# Altium PCB Receiver.PcbDoc
Units mil, origin at the board's own origin, x right, y up, seen from the top; angles counter-clockwise.
Board outline 6000 x 4000 mil, 2 copper layers (Top Layer, Bottom Layer); 42 components, 41 nets, 238 pads, 0 vias.
Unrouted connection lines stored in the file: 111.
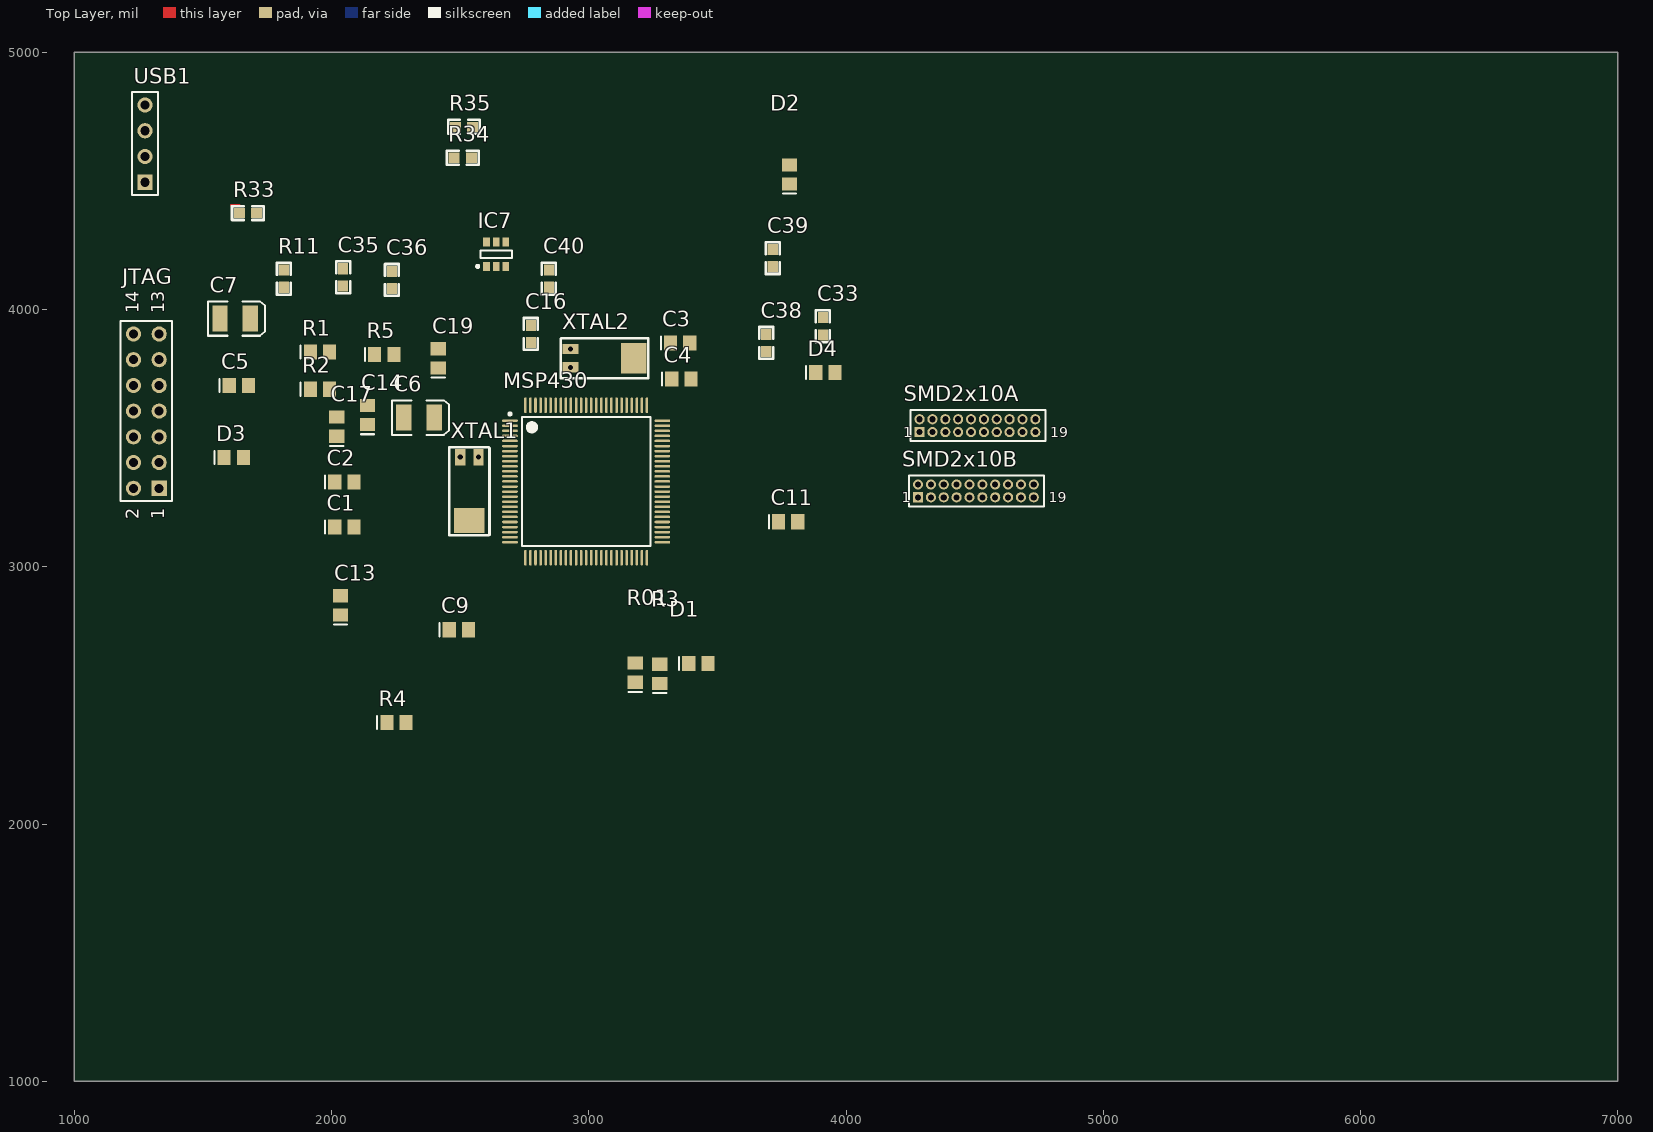
[diagram p0: Top Layer view]
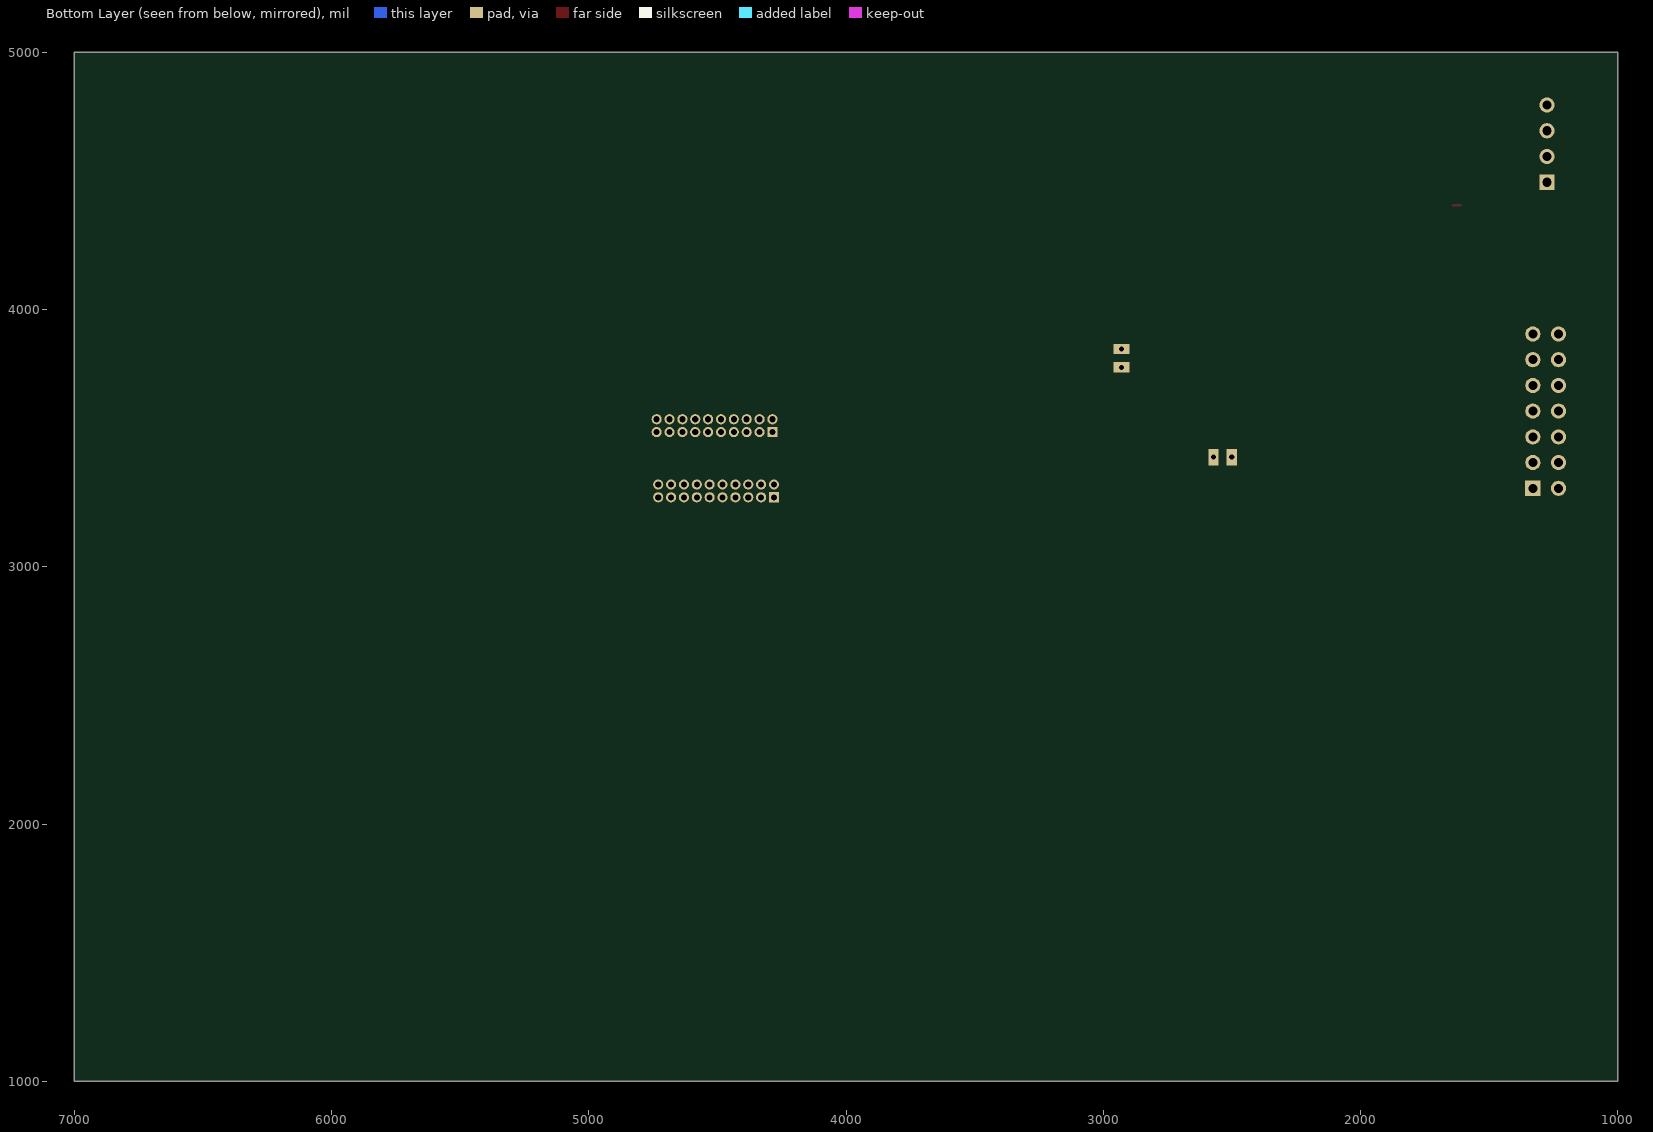
[diagram p1: Bottom Layer view, seen from below]

## Layer stack, top to bottom
Top Layer: signal copper 1.4
Dielectric: dielectric 12.6, FR-4, Dk 4.8
Bottom Layer: signal copper 1.4

## Board outline
1000,1000 7000,1000 7000,5000 1000,5000

## Design rules (kind name [scope] priority, off if disabled: settings)
Clearance [All] p1: gap=5
PolygonConnect [All] p1: connectstyle=Relief reliefconductorwidth=10 reliefentries=4 polygonreliefangle="90 Angle"
RoomDefinition Receiver [InComponentClass('Receiver')] p1: confinementstyle=ConfineIn formatcopy=TRUE lockcomponents=FALSE outline 990,990 7005,990 7005,5005 990,5005
RoutingVias [All] p1: holewidth=28 width=50 viastyle="Through Hole" minholewidth=28 minwidth=50 maxholewidth=28 maxwidth=50
SMDNeckDown [All] p1: percent=50.000
SilkscreenOverComponentPads [All] p1: minsilkscreentomaskgap=10
SolderMaskExpansion [All] p1: expansion=4
Width [All] p1: maxlimit=10 minlimit=10 preferedwidth=10
27 further rules are at their usual default settings.

## Components (designator, comment, footprint, x,y, rotation, side; value= is the part's Value field where it differs from the comment)
C1 "12pF" CC2012-0805 2050,3155 r0 top
C2 "12pF" CC2012-0805 2050,3330 r0 top
C3 "47pF" CC2012-0805 3355,3870 r0 top
C4 "47pF" CC2012-0805 3360,3730 r0 top
C5 "100nF" CC2012-0805 1640,3705 r0 top
C6 "10uF" 3.5x2.8x1.9 2340,3580 r0 top
C7 "10uF" 3.5x2.8x1.9 1625,3965 r0 top
C9 "470nF" CC2012-0805 2495,2755 r0 top
C11 "100nF" CC2012-0805 3775,3175 r0 top
C13 "100nF" CC2012-0805 2035,2850 r90 top
C14 "100nF" CC2012-0805 2140,3590 r90 top
C16 "4.7nF" 0603 2775,3905 r90 top
C17 "100nF" CC2012-0805 2020,3545 r90 top
C19 "100nF" CC2012-0805 2415,3810 r90 top
C33 "220n" 0603 3910,3935 r90 top
C35 "10p" 0603 2045,4125 r90 top
C36 "10p" 0603 2235,4115 r90 top
C38 "220n" 0603 3690,3870 r90 top
C39 "4u7" 0603 3715,4200 r90 top
C40 "0.1u" 0603 2845,4120 r90 top
D1 "LED2" CC2012-0805 3426.06,2623.53 r0 top
D2 "LL103A" CC2012-0805 3780,4525 r90 top
D3 "LL103A" CC2012-0805 1620,3425 r0 top
D4 "LL103A" CC2012-0805 3920,3755 r0 top
IC7 "USBLC6-2SC6" SOT23-6_L 2640,4215 r90 top
JTAG "Header 7X2" HDR2X7 1330,3305 r90 top
MSP430 "MSP430F6638" PZ100_L 2989.84,3331.56 r0 top
R01 "Res2" CC2012-0805 3181.06,2588.53 r90 top
R1 "0" CC2012-0805 1955,3835 r0 top
R2 "0" CC2012-0805 1955,3690 r0 top
R3 "330" CC2012-0805 3276.06,2583.53 r90 top
R4 "0" cc2012-0805 2252.4,2395 r0 top
R5 "Res2" CC2012-0805 2205,3825 r0 top
R11 "Res1" 0603 1815,4120 r90 top
R33 "Res1" 0603 1675,4375 r180 top
R34 "Res1" 0603 2510,4590 r180 top
R35 "Res1" 0603 2515,4710 r180 top
SMD2x10A "SMD2x10" MHDR2X10 4286.06,3523.53 r0 top
SMD2x10B "SMD2x10" MHDR2X10 4280,3270 r0 top
USB1 "Header 4" HDR1X4 1275,4495 r90 top
XTAL1 "Q1" "XTAL MS1V-T1K bis" 2530,3295 r90 top
XTAL2 "Q2" "XTAL MS1V-T1K bis" 3060,3805 r180 top

## Footprints (in the part's own frame and the unit in brackets; to place one, negate y for a bottom-side part, rotate by r counter-clockwise, add the part's x,y. Pads: shape width x height; smd on the part's side, far side on the other; paste and mask are expansions set on the pad)
3.5x2.8x1.9 [mm] "SM LED; 2 C-Bend Leads; Body 3.5 x 2.8 x 1.9 mm, inc leads (LxWxH typ)"
  rect 1.5x2.6 smd: 1(-1.5,0) 2(1.5,0)
  silkscreen extent -2.65,-1.7 2.95,1.7
0603 [mil]
  rect 43.3x39.4 smd: 1(-33.45,0) 2(33.45,0)
  silkscreen extent -62,-27 62,27
CC2012-0805 [mm] "Chip Capacitor; Body 2.0 x 1.2 mm (LxW typ)"
  rect 1.3x1.5 smd: 1(-0.95,0) 2(0.95,0)
  silkscreen extent -1.9,-0.65 -1.9,0.65
cc2012-0805 [mm] "Chip Capacitor; Body 2.0 x 1.2 mm (LxW typ)"
  rect 1.3x1.5 smd: 1(-0.95,0) 2(0.95,0)
  silkscreen extent -1.9,-0.65 -1.9,0.65
HDR1X4 [mm] "Connector; Header; 4 Position"
  rect 1.5x1.5 hole 0.9: 1(0,0)
  round 1.5 hole 0.9: 2(2.54,0) 3(5.08,0) 4(7.62,0)
  silkscreen extent -1.27,-1.27 8.89,1.27
HDR2X7 [mm] "Connector; Header; 7x2 Position"
  rect 1.5x1.5 hole 0.9: 1(0,0)
  round 1.5 hole 0.9: 2(0,2.54) 3(2.54,0) 4(2.54,2.54) 5(5.08,0) 6(5.08,2.54) 7(7.62,0) 8(7.62,2.54) 9(10.16,0) 10(10.16,2.54) 11(12.7,0) 12(12.7,2.54) 13(15.24,0) 14(15.24,2.54)
  silkscreen extent -1.27,-1.27 16.51,3.81
MHDR2X10 [mm] "Connector; Header; 10x2 Position"
  rect 1x1 hole 0.6: 1(0,0)
  round 1 hole 0.6: 2(0,1.27) 3(1.27,0) 4(1.27,1.27) 5(2.54,0) 6(2.54,1.27) 7(3.81,0) 8(3.81,1.27) 9(5.08,0) 10(5.08,1.27) 11(6.35,0) 12(6.35,1.27) 13(7.62,0) 14(7.62,1.27) 15(8.89,0) 16(8.89,1.27) 17(10.16,0) 18(10.16,1.27) 19(11.43,0) 20(11.43,1.27)
  silkscreen extent -0.9,-0.9 12.43,2.17
PZ100_L [mm] "100-Pin Thin Quad Flat Pack 0.5 mm Pitch, IPC High Density"
  oval 1.55x0.25 smd: 1(-7.525,6) 2(-7.525,5.5) 3(-7.525,5) 4(-7.525,4.5) 5(-7.525,4) 6(-7.525,3.5) 7(-7.525,3) 8(-7.525,2.5) 9(-7.525,2) 10(-7.525,1.5) 11(-7.525,1) 12(-7.525,0.5) 13(-7.525,0) 14(-7.525,-0.5) 15(-7.525,-1) 16(-7.525,-1.5) 17(-7.525,-2) 18(-7.525,-2.5) 19(-7.525,-3) 20(-7.525,-3.5) 21(-7.525,-4) 22(-7.525,-4.5) 23(-7.525,-5) 24(-7.525,-5.5) 25(-7.525,-6) 51(7.525,-6) 52(7.525,-5.5) 53(7.525,-5) 54(7.525,-4.5) 55(7.525,-4) 56(7.525,-3.5) 57(7.525,-3) 58(7.525,-2.5) 59(7.525,-2) 60(7.525,-1.5) 61(7.525,-1) 62(7.525,-0.5) 63(7.525,0) 64(7.525,0.5) 65(7.525,1) 66(7.525,1.5) 67(7.525,2) 68(7.525,2.5) 69(7.525,3) 70(7.525,3.5) 71(7.525,4) 72(7.525,4.5) 73(7.525,5) 74(7.525,5.5) 75(7.525,6)
  oval 0.25x1.55 smd: 26(-6,-7.525) 27(-5.5,-7.525) 28(-5,-7.525) 29(-4.5,-7.525) 30(-4,-7.525) 31(-3.5,-7.525) 32(-3,-7.525) 33(-2.5,-7.525) 34(-2,-7.525) 35(-1.5,-7.525) 36(-1,-7.525) 37(-0.5,-7.525) 38(0,-7.525) 39(0.5,-7.525) 40(1,-7.525) 41(1.5,-7.525) 42(2,-7.525) 43(2.5,-7.525) 44(3,-7.525) 45(3.5,-7.525) 46(4,-7.525) 47(4.5,-7.525) 48(5,-7.525) 49(5.5,-7.525) 50(6,-7.525) 76(6,7.525) 77(5.5,7.525) 78(5,7.525) 79(4.5,7.525) 80(4,7.525) 81(3.5,7.525) 82(3,7.525) 83(2.5,7.525) 84(2,7.525) 85(1.5,7.525) 86(1,7.525) 87(0.5,7.525) 88(0,7.525) 89(-0.5,7.525) 90(-1,7.525) 91(-1.5,7.525) 92(-2,7.525) 93(-2.5,7.525) 94(-3,7.525) 95(-3.5,7.525) 96(-4,7.525) 97(-4.5,7.525) 98(-5,7.525) 99(-5.5,7.525) 100(-6,7.525)
  silkscreen extent -7.65,-6.35 6.35,6.8, body extent -7,-7 7,7, height 1.6
SOT23-6_L [mm] "SOT23, 6-Leads, Body 2.9x1.6mm, Pitch 0.95mm, Lead Span 2.7mm, IPC High Density"
  rect 0.9x0.65 smd: 1(-1.2,0.95) 2(-1.2,0) 3(-1.2,-0.95) 4(1.2,-0.95) 5(1.2,0) 6(1.2,0.95)
  silkscreen extent -1.32,-1.55 0.35,1.95, body extent -0.9,-1.55 0.9,1.55, height 1.45
"XTAL MS1V-T1K bis" [mm]
  rect 1.6x1 hole 0.5: 1(3.327,-1.048) 2(3.327,0.752)
  rect 2.5x3 smd: GND(-2.923,-0.148)
  silkscreen extent -4.37,-2.13 4.29,1.83

## Part data
C1 C2 C3 C4 C5 C6 C7 C9 C11 C13 C14 C16 C17 C19 C33 C35 C36 C38 C39 C40: library part Cap, "Capacitor"
D1: "GREEN LED"
D2 D3: library part Diode, "Default Diode"
D4: library part Diode
JTAG: "Header, 7-Pin, Dual row"
R1 R2: library part Res2, "0R"
R3: library part Res2, "Resistor"
R4: library part Res2
R5: "47K"
R11 R33 R34 R35: "Resistor"
USB1: "Header, 4-Pin"
XTAL1 XTAL2: library part "XTAL MS1V-T1K"

## Nets (pads, with @x,y where several pads share a name; then routed paths per layer and width w, separated by ;. In a path a pad name is that pad's centre, name@x,y a point inside that pad or via, vN(x,y) a via of type N, cw(c..) or ccw(c..) an arc to the next point about the centre after c; other vN are vias at no path point)
AVSS: C6.2 C14.2 C17.1 MSP430.12 MSP430.15 MSP430.83 R1.1
DVCC1: C5.1 C7.1 C11.1 C13.2 C19.1 D3.2 D4.2 MSP430.25 MSP430.64 MSP430.89 R2.2 R5.2 SMD2x10B.9 SMD2x10B.11
GND: C1.1 C2.1 C3.1 C4.1 C5.2 C7.2 C9.1 C11.2 C13.1 C16.2 C19.2 C33.2 C35.1 C36.1 C38.2 C39.1 C40.2 D1.2 IC7.3 MSP430.26 MSP430.63 MSP430.76 MSP430.90 R4.1 R11.1 SMD2x10A.1 SMD2x10A.19 SMD2x10B.2 SMD2x10B.4 SMD2x10B.6 SMD2x10B.8 SMD2x10B.10 SMD2x10B.12 SMD2x10B.14 SMD2x10B.16 SMD2x10B.18 SMD2x10B.20
MSP36: MSP430.36 SMD2x10A.5
MSP38: MSP430.38 SMD2x10A.3
NetC1_1: C1.2 MSP430.14 XTAL1.1
NetC2_1: C2.2 MSP430.13 XTAL1.2
NetC3_1: C3.2 MSP430.85 XTAL2.1
NetC4_1: C4.2 MSP430.84 XTAL2.2
NetC6_1: C6.1 C14.1 MSP430.9
NetC9_2: C9.2 MSP430.27 R4.2
NetC16_1: C16.1 MSP430.86
NetC17_2: C17.2 MSP430.11 R2.1
NetD1_1: D1.1 R3.2
NetD2_1: D2.1 USB1.1
NetD3_1: D3.1 JTAG.2
NetIC7_1: IC7.1 R35.2 USB1.2
NetIC7_4: IC7.4 R34.2 USB1.3
NetJTAG_9: JTAG.9 MSP430.96 R1.2 R5.1
NetMSP430_34: MSP430.34 R01.1
NetMSP430_37: MSP430.37 SMD2x10A.12
NetMSP430_39: MSP430.39 SMD2x10A.6
NetMSP430_40: MSP430.40 SMD2x10A.8
NetMSP430_41: MSP430.41 SMD2x10A.10
NetMSP430_59: MSP430.59 SMD2x10A.16
NetMSP430_60: MSP430.60 SMD2x10A.18
NetMSP430_61: MSP430.61 SMD2x10A.20
NetMSP430_62: MSP430.62 SMD2x10A.14
NetR01_2: R01.2 R3.1
PU.0/DP: C35.2 MSP430.77 R11.2 R33.2 R34.1
PU.1/DM: C36.2 MSP430.79 R35.1
PUR: MSP430.78 R33.1
TCK: JTAG.7 MSP430.95
TDI: JTAG.3 MSP430.93
TDO: JTAG.1 MSP430.92
TEST/SBWTCK: JTAG.8 MSP430.91
TMS: JTAG.5 MSP430.94
V18: C38.1 MSP430.82
VBAT: MSP430.87
VBUS: C39.2 C40.1 D2.2 IC7.6 MSP430.80
VUSB: C33.1 D4.1 MSP430.81
pads on no net: IC7.2 IC7.5 JTAG.4 JTAG.6 JTAG.10 JTAG.11 JTAG.12 JTAG.13 JTAG.14 MSP430.1 MSP430.2 MSP430.3 MSP430.4 MSP430.5 MSP430.6 MSP430.7 MSP430.8 MSP430.10 MSP430.16 MSP430.17 MSP430.18 MSP430.19 MSP430.20 MSP430.21 MSP430.22 MSP430.23 MSP430.24 MSP430.28 MSP430.29 MSP430.30 MSP430.31 MSP430.32 MSP430.33 MSP430.35 MSP430.42 MSP430.43 MSP430.44 MSP430.45 MSP430.46 MSP430.47 MSP430.48 MSP430.49 MSP430.50 MSP430.51 MSP430.52 MSP430.53 MSP430.54 MSP430.55 MSP430.56 MSP430.57 MSP430.58 MSP430.65 MSP430.66 MSP430.67 MSP430.68 MSP430.69 MSP430.70 MSP430.71 MSP430.72 MSP430.73 MSP430.74 MSP430.75 MSP430.88 MSP430.97 MSP430.98 MSP430.99 MSP430.100 SMD2x10A.2 SMD2x10A.4 SMD2x10A.7 SMD2x10A.9 SMD2x10A.11 SMD2x10A.13 SMD2x10A.15 SMD2x10A.17 SMD2x10B.1 SMD2x10B.3 SMD2x10B.5 SMD2x10B.7 SMD2x10B.13 SMD2x10B.15 SMD2x10B.17 SMD2x10B.19 USB1.4 XTAL1.GND XTAL2.GND
copper on no net: | length 31.7
  Top Layer w10: 1609.9,4404.7 1641.55,4404.7

## Text inside footprints (layer, text, board x,y; h text height)
JTAG: Top Overlay "2" at 1250,3185 h50 r90; Top Overlay "1" at 1350,3185 h50 r90; Top Overlay "14" at 1250,3985 h50 r90; Top Overlay "13" at 1350,3985 h50 r90
SMD2x10A: Top Overlay "1" at 4223.07,3503.53 h39.37; Top Overlay "19" at 4793.94,3503.53 h39.37
SMD2x10B: Top Overlay "1" at 4217.01,3250 h39.37; Top Overlay "19" at 4787.87,3250 h39.37